# Altium PCB MB784.PCBDOC (part 4 of 4)
Units mil, origin at the board's own origin, x right, y up, seen from the top; angles counter-clockwise.
Board outline 4505 x 6805 mil, 4 copper layers (TopLayer, GND, S1, BottomLayer); 363 components, 323 nets, 1564 pads, 534 vias.
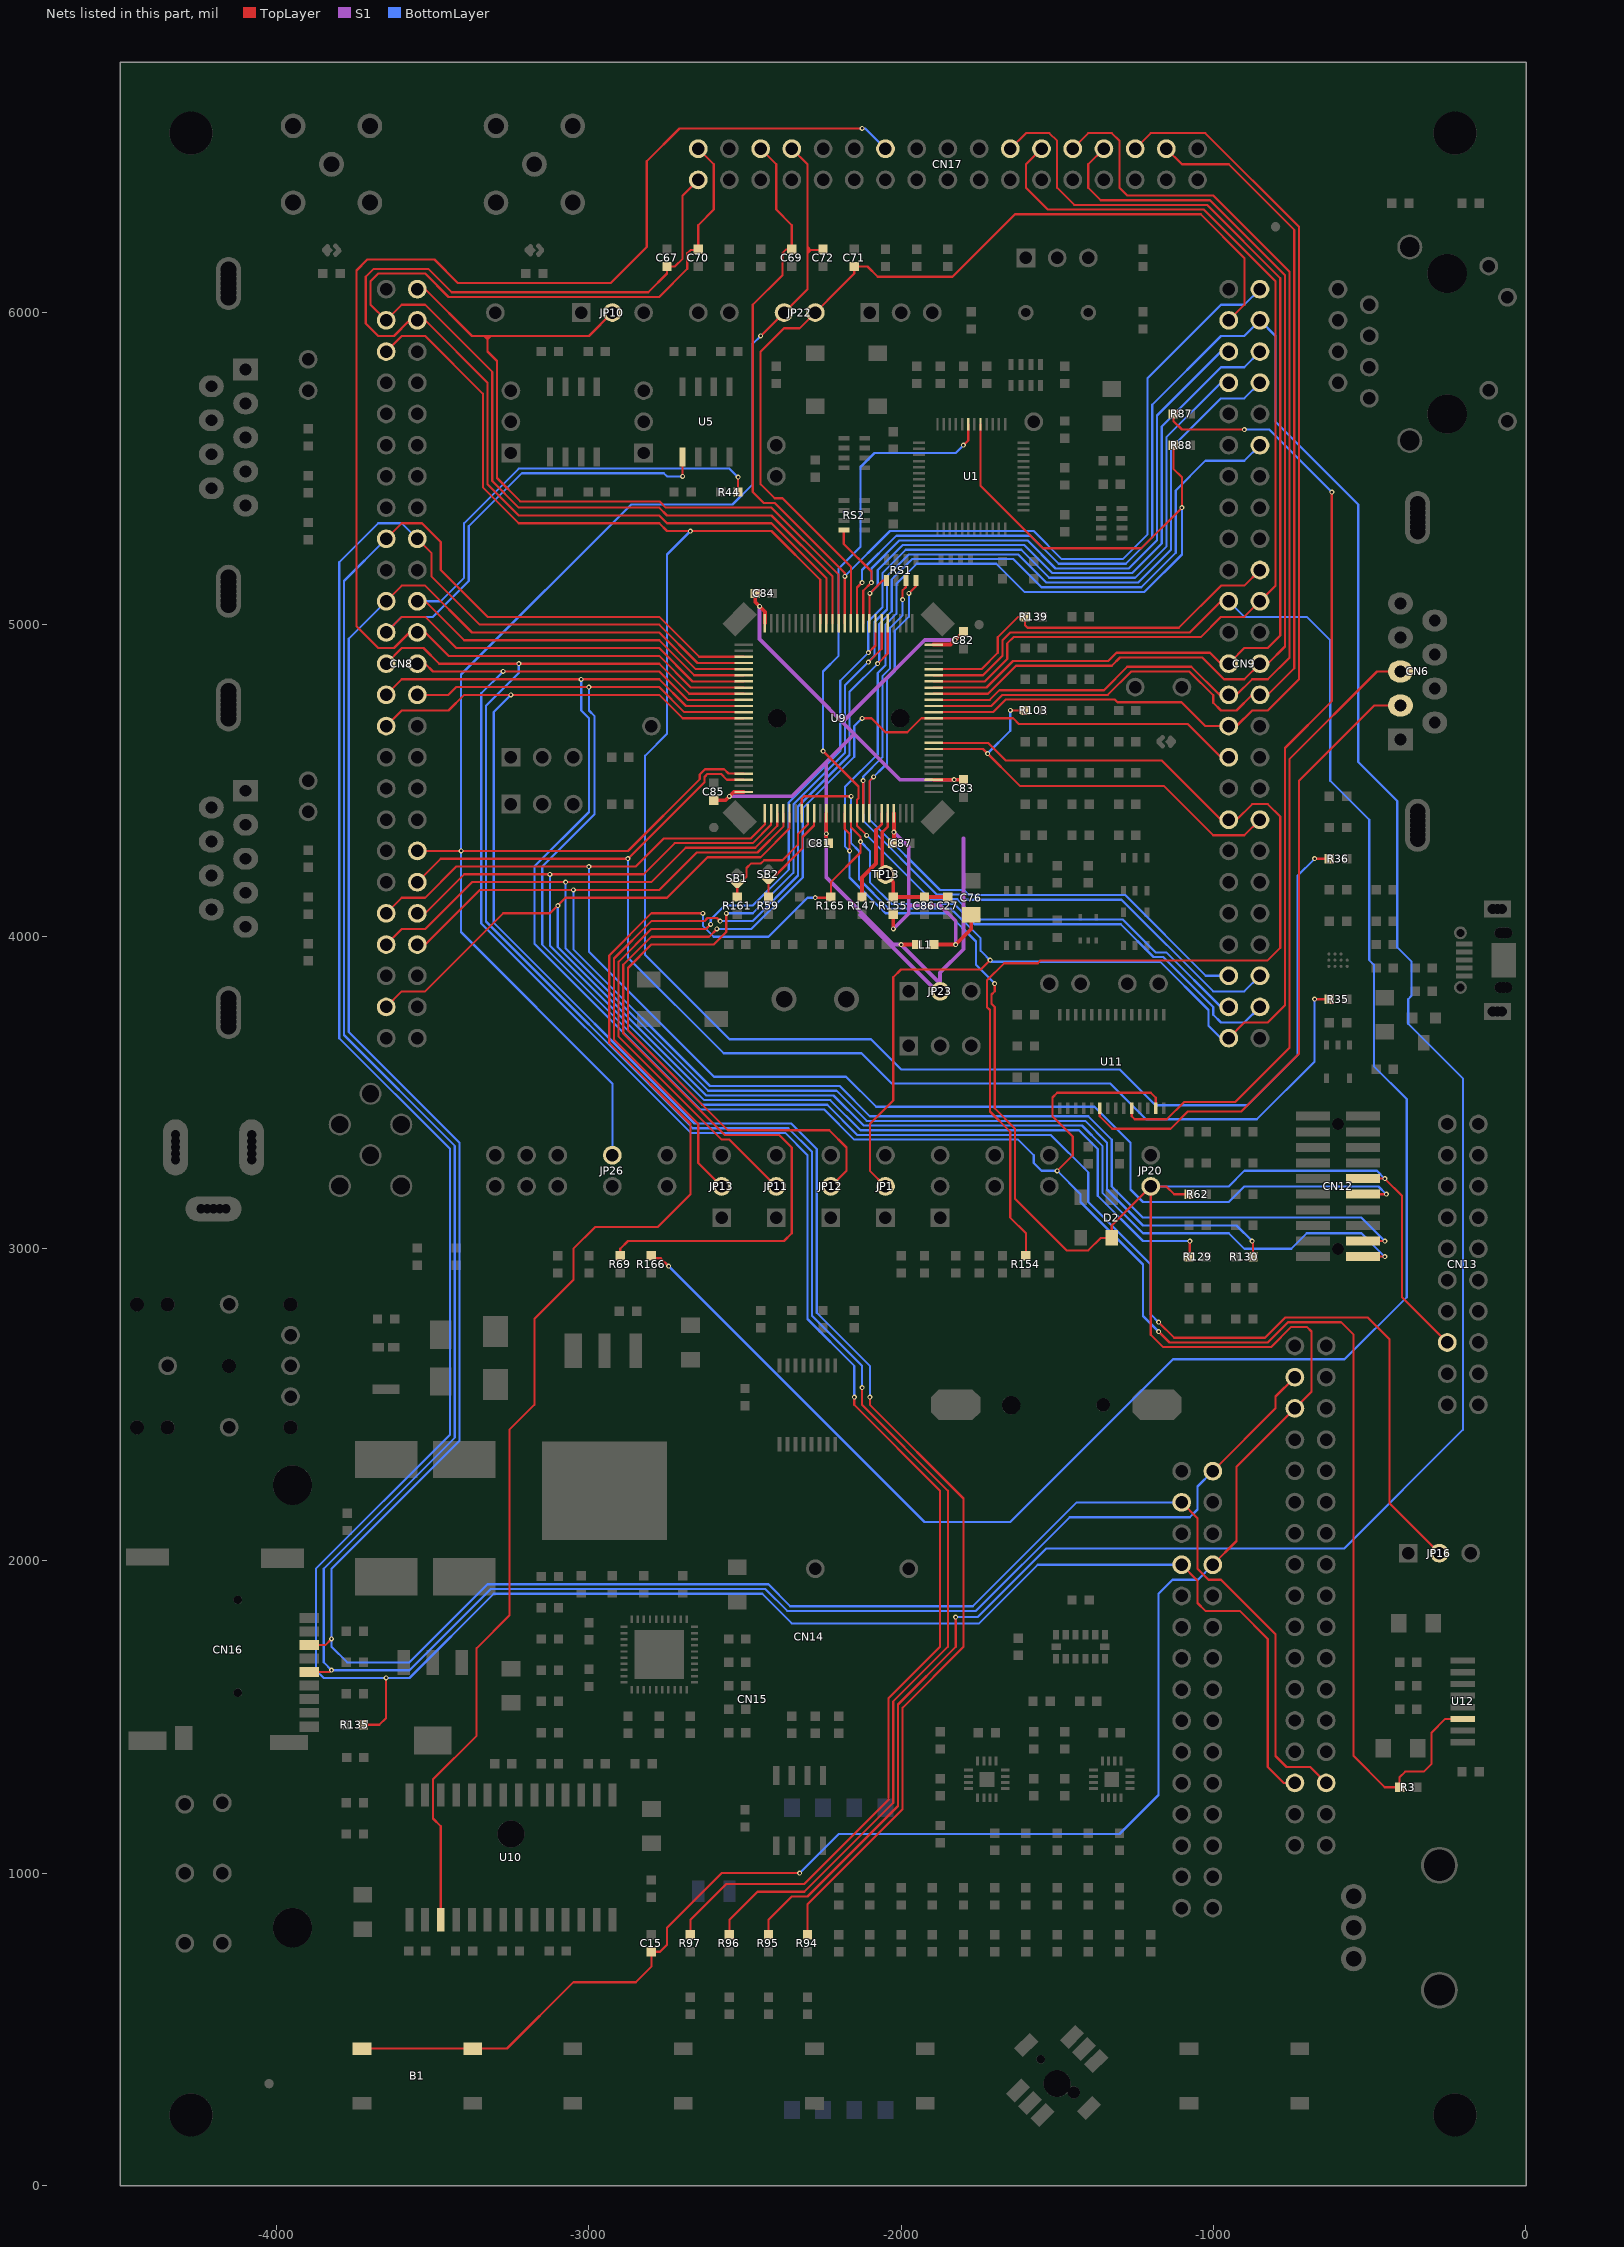
[diagram p6: the nets of this part, all layers, seen from the top]

## Via types
v1: diameter 16, hole 8, TopLayer to BottomLayer, tented both sides, 534 vias

## Nets (pads, with @x,y where several pads share a name; then routed paths per layer and width w, separated by ;. In a path a pad name is that pad's centre, name@x,y a point inside that pad or via, vN(x,y) a via of type N, cw(c..) or ccw(c..) an arc to the next point about the centre after c; other vN are vias at no path point) (continued)
PC0: CN9.48 R165.1 U9.15 U10.3 | length 6472.8
  TopLayer w7: U10.3@-3475,850 -3475,1150 -3500,1175 -3500,1300 -3360,1440 -3360,1720 -3255,1825 -3255,2420 -3175,2500 -3175,2775 -3050,2900 -3050,3000 -2980,3070 -2780,3070 -2675,3175 -2675,3400 -2935,3660 -2935,3940 -2800,4075 v1(-2635,4075) ; v1(-2275,4125) R165.1@-2225,4125 ; R165.1@-2225,4127.5 -2225,4175 -2130,4270 -2130,4320 -2160,4350 U9.15@-2160,4395.24
  BottomLayer w7: v1(-2635,4075) -2635,4035 -2600,4000 -2425,4000 -2300,4125 v1(-2275,4125) ; v1(-2130,4305) -2100,4275 -2100,4175 -2030,4105 -1830,4105 -1765,4040 -1296.21,4040 -1191.21,3935 -1160,3935 -1000,3775 -1000,3750 -975,3725 -900,3725 CN9.48@-850,3775
PC1: CN9.47 U1.31 U9.16 | length 3112
  TopLayer w7: v1(-2250,4595) -2136.26,4481.26 -2136.26,4443.74 -2140.94,4439.06 -2140.94,4355.94 v1(-2110,4325) ; v1(-1800,5575) -1784.84,5590.16 U1.31@-1784.84,5642.32
  BottomLayer w7: v1(-2250,4595) -2250,4850 -2200,4900 -2200,5180 -2130,5250 -2130,5505 -2085,5550 -1825,5550 v1(-1800,5575) ; v1(-2110,4325) -1905,4120 -1820,4120 -1755,4055 -1290,4055 -1185,3950 -1150,3950 -975,3775 CN9.47@-950,3775
PC2: CN9.46 RS1.4 U9.17 | length 2449.3
  TopLayer w7: U9.17@-2121.26,4395.87 v1(-2121.26,4499.95) ; v1(-1995,5080) -1995,5110 -1984.25,5120.75 RS1.4@-1984.25,5141.5
  BottomLayer w7: v1(-1995,5080) -1995,5030 -2035,4990 -2035,4860 -2060,4835 -2060,4575 -2121.26,4513.74 -2121.26,4371.26 -1885,4135 -1810,4135 -1793.5,4118.5 -1293.5,4118.5 -1000,3825 -900,3825 CN9.46@-850,3875
PC3: CN9.45 RS1.2 U9.18 | length 2306.5
  TopLayer w7: U9.18@-2101.57,4395.87 -2101.57,4498.43 v1(-2087.9,4512.1) ; v1(-1975,5100) -1952.76,5122.24 RS1.2@-1952.76,5141.5
  BottomLayer w7: v1(-1975,5100) -1975,5025 -2020,4980 -2020,4850 -2045,4825 -2045,4555 -2100,4500 -2100,4375 -1875,4150 -1800,4150 -1783.5,4133.5 -1282.14,4133.5 -1023.64,3875 CN9.45@-950,3875
PC4: CN9.36 R103.1 U9.33 | length 1396.7
  TopLayer w7: U9.33@-1895.87,4601.57 -1737.35,4601.57 -1619.28,4483.5 -1158.5,4483.5 -1000,4325 -900,4325 CN9.36@-850,4375 ; v1(-1650,4725) R103.1@-1602.5,4725
  BottomLayer w7: v1(-1722.89,4587.11) -1650,4660 v1(-1650,4725)
PC5: CN9.35 R154.1 U9.34 | length 3587.9
  TopLayer w7: U9.34@-1895.87,4621.26 -1721.26,4621.26 -1665,4565 -1165,4565 -975,4375 -925,4375 -875,4425 -825,4425 -785,4385 -785,3965 -826.5,3923.5 -1554.07,3923.5 -1562.22,3915.35 -1669.65,3915.35 -1725,3860 -1725,3775 -1715,3765 -1715,3440 -1650,3375 -1650,3100 -1600,3050 R154.1@-1600,2977.5
PC6: CN8.2 JP10.2 U9.63 | length 2603.2
  TopLayer w7: CN8.2@-3560,6075 -3525,6075 -3375,5925 -3000,5925 JP10.2@-2925,6000 ; -3335,5925 -3325,5915 -3315,5925 ; -3325,5925 -3325,5875 -3295,5845 -3295,5470 -3220,5395 -2773.79,5395 -2753.79,5375 -2415,5375 -2200,5160 U9.63@-2200,5004.13
PC7: C70.2 CN8.3 CN17.33 U9.64 | length 3860.6
  TopLayer w7: CN17.33@-2650,6525 -2600,6475 -2600,6330 -2650,6280 C70.2@-2650,6202.5 -2652.5,6200 -2675,6200 -2685,6190 -2685,6140 -2775,6050 -3450,6050 -3525,6125 -3675,6125 -3700,6100 -3700,6025 CN8.3@-3650,5975 -3600,6025 -3525,6025 -3310,5810 -3310,5460 -3225,5375 -2775,5375 -2750,5350 -2415,5350 -2219.69,5154.69 U9.64@-2219.69,5004.13
PC8: C67.2 CN8.4 CN17.34 U9.65 | length 3727.9
  TopLayer w7: CN17.34@-2650,6425 -2700,6375 -2700,6172.5 -2725,6147.5 C67.2@-2750,6147.5 -2750,6125 -2810,6065 -3440,6065 -3515,6140 -3690,6140 -3715,6115 -3715,5965 -3675,5925 -3625,5925 -3575,5975 -3525,5975 -3325,5775 -3325,5450 -3225,5350 -2775,5350 -2750,5325 -2415,5325 -2239.37,5149.37 U9.65@-2239.37,5004.13
PC9: CN8.5 R36.2 U9.66 | length 6525.2
  TopLayer w7: CN8.5@-3650,5875 -3600,5925 -3525,5925 -3340,5740 -3340,5440 -3225,5325 -2775,5325 -2750,5300 -2415,5300 -2259.06,5144.06 U9.66@-2259.06,5004.13 ; v1(-675,4250) R36.2@-627.5,4250
  BottomLayer w7: v1(-2675,5300) -2750,5225 -2750,4650 -2820,4580 -2820,3941.69 -2549.81,3671.5 -2096.5,3671.5 -2000,3575 -1300,3575 -1185,3460 -890,3460 -730,3620 -730,4195 v1(-675,4250)
PC10: CN8.17 CN14.3 CN15.2 CN16.5 U9.78 | length 9082.4
  TopLayer w7: CN16.5@-3896.65,1643.7 -3831.3,1643.7 v1(-3825,1650) ; CN8.17@-3650,5275 -3600,5325 -3535,5325 -3475,5265 -3475,5175 -3325,5025 -2775,5025 -2646.85,4896.85 U9.78@-2504.13,4896.85 ; CN15.2@-1001.06,2287.72 -800,2488.78 -800,2526.78 CN14.3@-738.06,2588.72
  BottomLayer w7: CN8.17@-3650,5275 -3785,5140 -3785,3685 -3430,3330 -3430,2395 -3850,1975 -3850,1675 v1(-3825,1650) -3575,1650 -3315,1910 -2435,1910 -2365,1840 -1760,1840 -1460,2140 -1075,2140 -1050,2165 -1050,2238.78 CN15.2@-1001.06,2287.72
PC11: CN8.18 CN14.29 CN15.7 R135.1 U9.79 | length 9609.9
  TopLayer w7: R135.1@-3722.5,1475 -3671.69,1475 -3650,1496.69 v1(-3650,1625) ; CN8.18@-3550,5275 -3505,5230 -3505,5155 -3350,5000 -2775,5000 -2652.17,4877.17 U9.79@-2504.13,4877.17 ; CN15.7@-1101.06,1987.72 -1050,1936.65 -1050,1865 -1025,1840 -915,1840 -825,1750 -825,1340 -773.72,1288.72 CN14.29@-738.06,1288.72
  BottomLayer w7: CN8.18@-3550,5275 -3600,5325 -3675,5325 -3800,5200 -3800,3675 -3445,3320 -3445,2405 -3875,1975 -3875,1650 -3850,1625 -3575,1625 -3305,1895 -2445,1895 -2350,1800 -1750,1800 -1562.28,1987.72 CN15.7@-1101.06,1987.72
PC12: CN8.21 CN14.30 CN15.3 CN16.3 U9.80 | length 9250.7
  TopLayer w7: CN16.3@-3896.65,1730.31 -3844.69,1730.31 v1(-3825,1750) ; CN8.21@-3650,5075 -3600,5125 -3525,5125 -3375,4975 -2775,4975 -2657.48,4857.48 U9.80@-2504.13,4857.48 ; CN15.3@-1097.72,2187.72 CN15.3@-1101.06,2187.72 -1050,2136.65 -1050,1975 -1015,1940 -975,1940 -800,1765 -800,1375 -765,1340 -689.35,1340 CN14.30@-638.06,1288.72
  BottomLayer w7: CN8.21@-3650,5075 -3770,4955 -3770,3695 -3415,3340 -3415,2385 -3825,1975 -3825,1725 -3775,1675 -3575,1675 -3325,1925 -2425,1925 -2355,1855 -1770,1855 -1437.28,2187.72 CN15.3@-1101.06,2187.72
PC13: CN9.49 JP1.2 R87.1 U9.7 | length 5541.2
  TopLayer w7: U9.7@-2318.11,4395.87 -2318.11,4441.89 -2310,4450 v1(-2160,4450) ; JP1.2@-2050,3200 -2100,3250 -2100,3400 -2025,3475 -2025,3870 -2000,3895 -1745,3895 v1(-1715,3925) ; R87.1@-1127.5,5675 -1127.5,5652.5 -1100,5625 v1(-900,5625) ; CN9.49@-950,3675 -900,3725 -825,3725 -770,3780 -770,4605 -620,4755 v1(-620,5425)
  BottomLayer w7: v1(-2160,4450) -2160,4300 -2135,4275 -2135,4185 -2040,4090 -1840,4090 -1745,3995 -1745,3955 -1710,3920 -1170,3920 -1015,3765 -1015,3715 -975,3675 CN9.49@-950,3675 ; v1(-900,5625) -820,5625 v1(-620,5425)
PC14: R161.2 SB1.1 U9.8 | length 414.9
  TopLayer w7: R161.2@-2525,4127.5 -2525,4162.19 -2495,4192.19 -2495,4220 -2480,4235 -2448.79,4235 -2438.79,4245 -2380,4245 -2330.71,4294.29 -2330.71,4328.08 -2298.43,4360.36 U9.8@-2298.43,4395.87
PC15: R59.2 SB2.1 U9.9 | length 325.6
  TopLayer w7: R59.2@-2425,4127.5 SB2.1@-2425,4182 ; SB2.1@-2417,4182 -2315.71,4283.29 -2315.71,4319.29 -2278.74,4356.26 U9.9@-2278.74,4395.87
PD0: CN8.22 R44.2 U9.81 | length 2509.1
  TopLayer w7: CN8.22@-3550,5075 -3525,5075 -3400,4950 -2775,4950 -2662.8,4837.8 U9.81@-2504.13,4837.8 ; R44.2@-2522.5,5425 v1(-2522.5,5472.5)
  BottomLayer w7: CN8.22@-3550,5075 -3475,5075 -3400,5150 -3400,5325 -3225,5500 -2550,5500 v1(-2522.5,5472.5)
PD1: CN8.23 U5.1 U9.82 | length 2582.7
  TopLayer w7: CN8.23@-3650,4975 -3600,5025 -3525,5025 -3425,4925 -2775,4925 -2668.11,4818.11 U9.82@-2504.13,4818.11 ; v1(-2700,5475) U5.1@-2700,5537.5
  BottomLayer w7: CN8.23@-3650,4975 -3600,5025 -3500,5025 -3385,5140 -3385,5315 -3215,5485 -2760,5485 -2750,5475 v1(-2700,5475)
PD2: CN8.24 CN17.21 U9.83 | length 4637.3
  TopLayer w7: U9.83@-2504.13,4798.43 -2673.43,4798.43 -2775,4900 -3450,4900 -3525,4975 -3575,4975 -3625,4925 -3675,4925 -3745,4995 -3745,6135 -3710,6170 -3495,6170 -3420,6095 -2930,6095 -2815,6210 -2815,6485 -2710,6590 v1(-2125,6590)
  BottomLayer w7: v1(-2125,6590) -2115,6590 CN17.21@-2050,6525
PD3: CN8.25 R96.2 U9.84 | length 6513.5
  TopLayer w7: CN8.25@-3650,4875 -3600,4925 -3530,4925 -3480,4875 -2775,4875 -2678.74,4778.74 U9.84@-2504.13,4778.74 ; R96.2@-2550,802.5 -2550,850 -2460,940 -2310,940 -2025,1225 -2025,1550 -1850,1725 -1850,2225 -2125,2500 v1(-2125,2555)
  BottomLayer w7: v1(-3225,4875) -3225,4845 -3330,4740 -3330,4048.64 -2667.86,3386.5 -2361.5,3386.5 -2285,3310 -2285,2785 -2125,2625 v1(-2125,2555)
PD4: CN8.26 R97.2 U9.85 | length 6434.3
  TopLayer w7: CN8.26@-3550,4875 -3525,4875 -3500,4850 -2775,4850 -2684.06,4759.06 U9.85@-2504.13,4759.06 ; R97.2@-2675,802.5 -2675,850 -2560,965 -2310,965 -2040,1235 -2040,1560 -1875,1725 -1875,2225 -2150,2500 v1(-2150,2525)
  BottomLayer w7: v1(-3275,4850) -3345,4780 -3345,4042.43 -2674.07,3371.5 -2371.5,3371.5 -2300,3300 -2300,2775 -2150,2625 v1(-2150,2525)
PD5: CN8.27 R3.2 U9.86 U11.13 U12.3 | length 8025.1
  TopLayer w7: CN8.27@-3650,4775 -3600,4825 -2775,4825 -2689.37,4739.37 U9.86@-2504.13,4739.37 ; v1(-1500,3250) -1450,3300 -1450,3360 -1515,3425 -1515,3485 -1500,3500 -1200,3500 -1184.25,3484.25 U11.13@-1184.25,3450.39 ; v1(-1175,2735) -1140,2700 -825,2700 -760,2765 -590,2765 -550,2725 -550,1375 -450,1275 R3.2@-402.5,1275 -402.5,1307.5 -385,1325 -325,1325 -300,1350 -300,1450 -256.1,1493.9 U12.3@-200,1493.9
  BottomLayer w7: v1(-3025,4825) -3025,4725 -3000,4700 -3000,4400 -3175,4225 -3175,3978.49 -2643.01,3446.5 -2246.5,3446.5 -2150,3350 -1625,3350 -1575,3300 -1575,3275 -1550,3250 v1(-1500,3250) -1425,3175 -1425,3150 -1225,2950 -1225,2785 v1(-1175,2735)
PD6: CN8.28 JP16.2 U9.87 | length 6185.3
  TopLayer w7: CN8.28@-3550,4775 -3450,4775 -3425,4800 -2775,4800 -2694.68,4719.68 U9.87@-2504.13,4719.68 ; v1(-1175,2765) -1125,2715 -833.79,2715 -768.79,2780 -505,2780 -435,2710 -435,2185 JP16.2@-275,2025
  BottomLayer w7: v1(-3000,4800) -3000,4725 -2981.89,4706.89 -2981.89,4393.11 -3150,4225 -3150,3974.71 -2636.79,3461.5 -2236.5,3461.5 -2140,3365 -1520,3365 -1400,3245 -1400,3150 -1200,2950 -1200,2790 v1(-1175,2765)
PD7: CN8.29 R94.2 U9.88 | length 6225.8
  TopLayer w7: CN8.29@-3650,4675 -3600,4725 -3450,4725 -3400,4775 -2775,4775 -2700,4700 U9.88@-2504.13,4700 ; R94.2@-2300,802.5 -2300,900 -1995,1205 -1995,1530 -1800,1725 -1800,2200 -2100,2500 v1(-2100,2525)
  BottomLayer w7: v1(-3250,4775) -3305,4720 -3305,4044.85 -2661.65,3401.5 -2351.5,3401.5 -2270,3320 -2270,2795 -2100,2625 v1(-2100,2525)
PD8: CN9.12 JP13.2 U9.55 | length 4346.9
  TopLayer w7: v1(-2580,4050) -2590,4060 -2620,4060 -2630,4050 -2800,4050 -2920,3930 -2920,3670 -2650,3400 -2650,3275 JP13.2@-2575,3200 ; v1(-2075,4875) -2042.52,4907.48 U9.55@-2042.52,5004.13
  BottomLayer w7: v1(-2580,4050) -2476.21,4050 -2330,4196.21 -2330,4417.57 -2165,4582.57 -2165,4785 -2070,4880 -2070,5002.57 -2030,5042.57 -2030,5145 -1965,5210 -1640,5210 -1550,5120 -1230,5120 -1120,5230 -1120,5430 -1025,5525 -900,5525 CN9.12@-850,5575
PD9: CN9.8 JP12.2 U9.56 | length 4825.4
  TopLayer w7: v1(-2560,4075) -2560,4015 -2600,3975 -2800,3975 -2875,3900 -2875,3700 -2555,3380 -2230,3380 -2175,3325 -2175,3250 JP12.2@-2225,3200 ; v1(-2105,4880) -2062.2,4922.8 U9.56@-2062.2,5004.13
  BottomLayer w7: v1(-2560,4075) -2475,4075 -2345,4205 -2345,4423.79 -2180,4588.79 -2180,4805 -2085,4900 -2085,5008.79 -2045,5048.79 -2045,5155 -1975,5225 -1625,5225 -1535,5135 -1240,5135 -1135,5240 -1135,5565 -975,5725 -900,5725 CN9.8@-850,5775
PD10: CN9.7 JP11.2 U9.57 | length 4447.1
  TopLayer w7: v1(-2610,4040) -2625,4025 -2800,4025 -2905,3920 -2905,3680 -2575,3350 -2550,3350 JP11.2@-2395,3195 ; v1(-2105,4910) -2081.89,4933.11 U9.57@-2081.89,5004.13
  BottomLayer w7: v1(-2610,4040) -2610,4055 -2565,4100 -2475,4100 -2360,4215 -2360,4430 -2195,4595 -2195,4820 v1(-2105,4910) -2105,5010 -2060,5055 -2060,5165 -1985,5240 -1615,5240 -1525,5150 -1250,5150 -1150,5250 -1150,5600 -975,5775 CN9.7@-950,5775
PD11: CN9.6 RS1.8 U9.58 | length 2058.8
  TopLayer w7: U9.58@-2101.57,5004.13 v1@-2101.57,5098.43 ; v1(-2100,5100) -2058.5,5141.5 RS1.8@-2047.24,5141.5
  BottomLayer w7: v1(-2100,5100) -2075,5125 -2075,5175 -1995,5255 -1605,5255 -1515,5165 -1260,5165 -1165,5260 -1165,5635 -975,5825 -900,5825 CN9.6@-850,5875
PD12: CN9.5 RS2.2 U9.59 | length 2132.9
  TopLayer w7: RS2.2@-2183.5,5302.76 -2183.5,5258.5 -2095,5170 v1(-2095,5135) -2121.26,5108.74 U9.59@-2121.26,5004.13
  BottomLayer w7: v1(-2095,5135) -2095,5180 -2005,5270 -1595,5270 -1505,5180 -1270,5180 -1180,5270 -1180,5670 -975,5875 CN9.5@-950,5875
PD13: CN9.4 R95.2 U9.60 | length 9108.7
  TopLayer w7: R95.2@-2425,802.5 -2425,850 -2350,925 -2300,925 -2010,1215 -2010,1540 -1825,1725 v1(-1825,1820) ; U9.60@-2140.94,5004.13 -2140.94,5119.06 v1(-2125,5135)
  BottomLayer w7: v1(-2125,5135) -2125,5175 -2015,5285 -1585,5285 -1495,5195 -1280,5195 -1195,5280 -1195,5705 -975,5925 -900,5925 CN9.4@-850,5975 -800,5925 -800,5650 -535,5385 -535,4560 -410,4435 -410,3966.07 -365,3921.07 -365,3810 -375,3800 -375,3721.21 -200,3546.21 -200,2420 -580,2040 -1535,2040 -1755,1820 v1(-1825,1820)
PD14: C71.2 CN9.3 JP22.2 U9.61 | length 3056.4
  TopLayer w7: U9.61@-2160.63,5004.13 -2160.63,5185.63 -2380,5405 -2405,5405 -2450,5450 -2450,5875 -2375,5950 -2325,5950 -2150,6125 C71.2@-2150,6147.5 -2107.5,6147.5 -2075,6115 -1835,6115 -1635,6315 -1040,6315 -900,6175 -900,6025 CN9.3@-950,5975
PD15: C69.2 CN9.2 CN17.29 U9.62 | length 3846.2
  TopLayer w7: CN17.29@-2450,6525 -2400,6475 -2400,6330 -2350,6280 C69.2@-2350,6202.5 -2367.5,6202.5 -2380,6190 -2380,6120 -2475,6025 -2475,5425 -2440,5390 -2405,5390 -2180.32,5165.32 U9.62@-2180.32,5004.13 U9.62@-2180,5003.82
  BottomLayer w7: v1(-2180.32,5155) -2035.32,5300 -1575,5300 -1485,5210 -1290,5210 -1210,5290 -1210,5790 -975,6025 -900,6025 CN9.2@-850,6075
PE0: C72.2 CN8.38 CN17.27 JP22.1 JP26.2 U9.97 | length 5341.5
  TopLayer w7: CN8.38@-3550,4275 -2875,4275 -2645,4505 -2645,4520 -2628.11,4536.89 -2566.89,4536.89 -2552.83,4522.83 U9.97@-2504.13,4522.83 ; v1(-2450,5925) -2300,6075 -2300,6475 CN17.27@-2350,6525 ; -2300,6190 -2290,6200 -2300,6210 ; -2300,6200 C72.2@-2252.5,6200
  BottomLayer w7: JP26.2@-2925,3300 -2925,3530 -3410,4015 -3410,4840 -2865,5385 -2540,5385 -2475,5450 -2475,5900 v1(-2450,5925)
  other v1: -3410,4275
PE1: CN8.40 R35.1 U9.98 | length 4262.9
  TopLayer w7: CN8.40@-3550,4175 -3475,4250 v1(-2875,4250) -2630,4495 -2630,4511.89 -2620,4521.89 -2576.89,4521.89 -2558.15,4503.15 U9.98@-2504.13,4503.15 ; v1(-675,3800) R35.1@-627.5,3800
  BottomLayer w7: v1(-2875,4250) -2875,3933.05 -2568.45,3626.5 -2126.5,3626.5 -2030,3530 -1330,3530 -1215,3415 -860,3415 -675,3600 v1(-675,3800)
PE2: CN8.41 CN12.12 U9.1 | length 4721.7
  TopLayer w7: CN8.41@-3650,4075 -3600,4125 -3525,4125 -3425,4225 -2850,4225 -2760,4315 -2481.54,4315 -2436.22,4360.31 U9.1@-2436.22,4395.87 ; CN12.12@-520,3175 v1(-445,3175)
  BottomLayer w7: v1(-3000,4225) -3000,3951.98 -2599.52,3551.5 -2176.5,3551.5 -2080,3455 -1380,3455 -1265,3340 -1265,3190 -1225,3150 -950,3150 -900,3200 -470,3200 v1(-445,3175)
PE3: CN8.42 R129.2 U9.2 | length 4094.5
  TopLayer w7: CN8.42@-3550,4075 -3525,4075 -3400,4200 -2825,4200 -2725,4300 -2475,4300 -2416.54,4358.46 U9.2@-2416.54,4395.87 ; R129.2@-1075,2977.5 v1(-1075,3025)
  BottomLayer w7: v1(-3125,4200) -3125,3970.92 -2630.58,3476.5 -2226.5,3476.5 -2130,3380 -1430,3380 -1370,3320 -1370,3170 -1225,3025 v1(-1075,3025)
PE4: CN8.43 R130.2 U9.3 | length 4390.5
  TopLayer w7: CN8.43@-3650,3975 -3600,4025 -3525,4025 -3375,4175 -2800,4175 -2690,4285 -2467.17,4285 -2396.85,4355.32 U9.3@-2396.85,4395.87 ; v1(-875,3025) -872.5,3022.5 R130.2@-872.5,2975
  BottomLayer w7: v1(-3075,4175) -3075,3963.35 -2618.15,3506.5 -2206.5,3506.5 -2110,3410 -1410,3410 -1340,3340 -1340,3190 -1225,3075 -925,3075 v1(-875,3025)
PE5: CN8.44 CN12.18 U9.4 | length 4707.8
  TopLayer w7: CN8.44@-3550,3975 -3525,3975 -3350,4150 -2775,4150 -2655,4270 -2460,4270 -2377.17,4352.83 U9.4@-2377.17,4395.87 ; CN12.18@-520,3025 v1(-450,3025)
  BottomLayer w7: v1(-3050,4150) -3050,3959.56 -2611.94,3521.5 -2196.5,3521.5 -2100,3425 -1400,3425 -1325,3350 -1325,3200 -1225,3100 -525,3100 v1(-450,3025)
PE6: CN8.47 CN12.20 U9.5 | length 4971.1
  TopLayer w7: CN8.47@-3650,3775 -3600,3825 -3525,3825 -3275,4075 -3125,4075 -3075,4125 -2750,4125 -2620,4255 -2450,4255 -2357.48,4347.52 U9.5@-2357.48,4395.87 ; CN12.20@-520,2975 v1(-450,2975)
  BottomLayer w7: v1(-3100,4100) -3100,3967.13 -2624.37,3491.5 -2216.5,3491.5 -2120,3395 -1420,3395 -1355,3330 -1355,3180 -1225,3050 -950,3050 -900,3000 -750,3000 -700,3050 -525,3050 v1(-450,2975)
PE7: CN9.31 R69.1 U9.38 | length 4323.1
  TopLayer w7: R69.1@-2900,2977.5 -2900,3000 -2875,3025 -2375,3025 -2350,3050 -2350,3325 -2390,3365 -2565,3365 -2890,3690 -2890,3910 -2800,4000 -2615,4000 v1(-2590,4025) ; v1(-2125,4700) -2095,4700 -2050,4655 -1980,4655 -1935,4700 -1641,4700 -1622.5,4681.5 -1081.5,4681.5 -975,4575 CN9.31@-950,4575
  BottomLayer w7: v1(-2590,4025) -2480,4025 -2315,4190 -2315,4411.36 -2150,4576.36 -2150,4675 v1(-2125,4700)
PE8: CN9.29 CN17.5 U9.39 | length 3389.9
  TopLayer w7: U9.39@-1895.87,4719.68 -1705.32,4719.68 -1665,4760 -1315,4760 -1306.5,4751.5 -1101.5,4751.5 -1025,4675 CN9.29@-940,4675 ; CN17.5@-1250,6525 -1200,6575 -1025,6575 -725,6275 -725,4825 -825,4725 -875,4725 CN9.29@-925,4675
PE9: CN9.28 CN17.3 U9.40 | length 3246
  TopLayer w7: U9.40@-1895.87,4739.37 -1710.63,4739.37 -1675,4775 -1337.5,4775 -1262.5,4850 -1076.21,4850 -1000,4773.79 -1000,4750 -975,4725 -925,4725 -875,4775 -825,4775 -740,4860 -740,6265 -950,6475 -1100,6475 CN17.3@-1150,6525
PE10: CN9.27 CN17.9 U9.41 | length 3469.6
  TopLayer w7: U9.41@-1895.87,4759.06 -1715.94,4759.06 -1685,4790 -1350,4790 -1275,4865 -1070,4865 -980,4775 CN9.27@-950,4775 ; CN17.9@-1450,6525 -1400,6575 -1325,6575 -1300,6550 -1300,6400 -1275,6375 -1000,6375 -755,6130 -755,4895 -825,4825 -875,4825 CN9.27@-925,4775
PE11: CN9.26 CN17.7 U9.42 | length 3328.2
  TopLayer w7: U9.42@-1895.87,4778.74 -1721.26,4778.74 -1631.5,4868.5 -1325,4868.5 -1298.5,4895 -1035,4895 -965,4825 -900,4825 CN9.26@-850,4875 -825,4875 -770,4930 -770,6120 -1010,6360 -1360,6360 -1400,6400 -1400,6475 CN17.7@-1350,6525
PE12: CN9.25 CN17.13 U9.43 | length 3511.6
  TopLayer w7: U9.43@-1895.87,4798.43 -1726.57,4798.43 -1641.5,4883.5 -1336.5,4883.5 -1310,4910 -1010,4910 -975,4875 CN9.25@-950,4875 ; CN17.13@-1650,6525 -1600,6575 -1525,6575 -1500,6550 -1500,6400 -1445,6345 -1020,6345 -785,6110 -785,4965 -825,4925 -900,4925 CN9.25@-944,4881
PE13: CN9.22 CN17.11 U9.44 | length 3297.2
  TopLayer w7: U9.44@-1895.87,4818.11 -1731.89,4818.11 -1660,4890 -1660,4940 -1640,4960 -1040,4960 -975,5025 -900,5025 -800,5125 -800,6100 -1030,6330 -1530,6330 -1600,6400 -1600,6475 CN17.11@-1550,6525
PE14: CN9.21 R166.1 U9.45 | length 6699.9
  TopLayer w7: R166.1@-2800,2970 -2770,2970 v1(-2745,2945) ; U9.45@-1895.87,4837.8 -1737.2,4837.8 -1675,4900 -1675,4950 -1650,4975 -1075,4975 CN9.21@-975,5075
  BottomLayer w7: v1(-2745,2945) -1925,2125 -1650,2125 -1129,2646 -579,2646 -380,2845 -380,3480 -485,3585 -485,3910 -500,3925 -500,4375 -625,4500 -625,4950 -700,5025 -900,5025 CN9.21@-950,5075
PE15: CN9.20 R139.2 U9.46 | length 1251.8
  TopLayer w7: U9.46@-1895.87,4857.48 -1742.52,4857.48 -1690,4910 -1690,4960 -1625,5025 R139.2@-1602.5,5025 -1602.5,4997.5 -1595,4990 -1110,4990 -975,5125 -900,5125 CN9.20@-850,5175
RESET#: B1.2 B1.3 C15.2 CN12.10 CN13.15 CN14.5 CN15.8 D2.1 JP20.2 R62.1 R88.2 U1.29 U9.14 | length 12813.7
  TopLayer w7: B1.2@-3727.17,437.5 -3262.5,437.5 -3050,650 -2850,650 -2800,700 C15.2@-2800,747.5 -2772.5,747.5 -2750,770 -2750,825 -2575,1000 v1(-2325,1000) ; U9.14@-2180.32,4395.87 -2180.32,4345.32 -2165,4330 v1(-2165,4275) ; U1.29@-1745.47,5642.32 -1745.47,5445.47 -1545,5245 -1230,5245 v1(-1100,5375) -1100,5472.5 -1127.5,5500 R88.2@-1127.5,5575 ; v1(-1700,3850) -1700,3825 -1710,3815 -1710,3785 -1700,3775 -1700,3450 -1635,3385 -1635,3160 -1470,2995 -1400,2995 -1360,3035 D2.1@-1325,3035 -1325,3075 JP20.2@-1200,3200 ; R62.1@-1077.5,3175 -1125,3175 -1150,3200 JP20.2@-1200,3200 ; CN15.8@-1001.06,1987.72 -925,2063.78 -925,2301.78 -685,2541.78 -685,2735 -700,2750 -750,2750 -815,2685 -1160,2685 -1200,2725 JP20.2@-1200,3200 ; CN12.10@-520,3225 v1(-450,3225) -395,3170 -395,2845 CN13.15@-250,2700
  BottomLayer w7: v1(-2325,1000) -2200,1125 -1300,1125 -1175,1250 -1175,1895 -1130,1940 -1048.78,1940 CN15.8@-1001.06,1987.72 ; v1(-1700,3850) -1760,3910 -1760,3985 -1850,4075 -2050,4075 -2165,4190 v1(-2165,4275) -2180,4290 -2180,4480 -2075,4585 -2075,4845 -2050,4870 -2050,5000 -2015,5035 -2015,5130 -1950,5195 -1695,5195 -1605,5105 -1220,5105 -1100,5225 v1(-1100,5375) ; JP20.2@-1200,3200 -950,3200 -900,3250 -475,3250 v1(-450,3225)
RXD: CN6.2 U11.6 | length 2079.6
  TopLayer w7: U11.6@-1363.39,3450.39 -1363.39,3425 -1323.39,3385 -1136.21,3385 -1081.21,3440 -910,3440 -725,3625 -725,4500 -484,4741 CN6.2@-400,4741
TXD: CN6.3 U11.10 | length 2026.8
  TopLayer w7: U11.10@-1261.02,3450.39 -1261.02,3425 -1251.02,3415 -1148.64,3415 -1093.64,3470 -930,3470 -755,3645 -755,4570 -475,4850 CN6.3@-400,4850
VDD_MCU: C81.1 C82.1 C83.1 C84.1 C85.1 JP23.2 L1.1 U9.11 U9.28 U9.50 U9.75 U9.100 | length 4191.4
  TopLayer w12: C85.1@-2600,4437.5 -2562.5,4437.5 -2536.22,4463.78 U9.100@-2504.13,4463.78 ; C84.1@-2467.5,5100 -2467.5,5072.5 -2436.22,5041.22 U9.75@-2436.22,5004.13 ; C81.1@-2239.37,4299.37 U9.11@-2239.37,4395.87 ; v1(-2000,3975) L1.1@-1950,3975 ; U9.28@-1895.87,4503.15 C83.1@-1800.65,4503.15 ; U9.50@-1895.87,4936.22 -1841.28,4936.22 C82.1@-1800,4977.5
  S1 w12: v1(-2549.93,4450.07) -2349.93,4450.07 -2150,4650 ; v1(-2453.59,5058.59) -2453.59,4953.59 -2003.15,4503.15 v1(-1830,4503.15) ; -2239.37,4560.63 -2239.37,4189.37 -2025,3975 v1(-2000,3975) JP23.2@-1875,3850 ; -2187.36,4687.64 -1924.29,4950.71 v1(-1826.79,4950.71) ; -2130,4070 -1885,3825 JP23.2@-1875,3825 -1875,3885 -1800,3960 -1800,4315
  other v1: -2239.37,4330
VDDA: C76.1 C87.1 L1.2 R155.2 U9.22 | length 920.6
  TopLayer w12: v1(-2025,4025) R155.2@-2025,4072.5 ; C87.1@-2022.83,4304.67 U9.22@-2022.83,4395.87 ; L1.2@-1895,3975 v1(-1825,3975) -1775,4025 C76.1@-1775,4070
  S1 w12: v1(-2025,4025) -1975,4075 -1975,4287.17 v1(-2022.83,4335) ; -1975,4100 -1875,4100 -1825,4050 v1(-1825,3975)
VREF+: C27.1 C86.1 R155.1 TP13.1 U9.21 | length 465.1
  TopLayer w8: -2060,4335.33 -2042.52,4352.82 U9.21@-2042.52,4395.87
  TopLayer w12: -2060,4335.33 -2060,4210 -2025,4175 R155.1@-2025,4127.5 C27.1@-1850,4127.5
VREF-: R147.2 U9.20 | length 294.4
  TopLayer w8: -2080,4342.2 -2062.2,4360 U9.20@-2062.2,4395.87
  TopLayer w12: R147.2@-2125,4127.5 -2125,4190 -2080,4235 -2080,4342.2
pads on no net: BT1.0 CN1.0 CN1.7 CN2.6 CN3.1 CN3.4 CN3.8 CN4.1 CN4.4 CN4.8 CN5.6 CN5.G0 CN6.4 CN6.6 CN6.7 CN6.9 CN7.0 CN8.31 CN8.32 CN9.23 CN9.24 CN12.0 CN12.7 CN14.0 CN14.2 CN14.4 CN14.6 CN14.7 CN14.8 CN14.9 CN14.10 CN14.11 CN14.12 CN14.13 CN14.14 CN14.15 CN14.16 CN14.17 CN14.18 CN14.19 CN14.20 CN14.21 CN15.0 CN15.4 CN15.5 CN15.6 CN15.17 CN15.18 CN15.19 CN15.20 CN15.21 CN15.22 CN15.23 CN15.24 CN15.25 CN15.26 CN15.27 CN15.28 CN15.29 CN15.30 CN16.0 CN16.1 CN16.8 RS3.7 RS3.8 RS6.8 U1.8 U1.9 U1.10 U1.11 U1.12 U4.A2 U4.B1 U4.B2 U4.C2 U5.5 U6.5 U9.0 U9.73 U10.10 U10.25 U11.5 U11.8 U11.9 U11.11 U11.12 U11.14 U11.15 U11.18 U11.20 U11.21 U12.2 U13.20 U13.21 U13.22 U13.23 U13.24 U13.25 U13.26 U13.36 U15.0 U24.1 U24.4 U24.5 U24.6 U24.7 U24.13 U24.14 U24.15 X2.2 X2.3
copper on no net: | length 11685
  TopLayer w5: -4375,1775 -4250,1775 ; -4375,1900 -4250,1900 -4125,1900 -4125,2150 ; -4375,1970 -4375,1650 ; -4375,2075 -4375,2150 ; -4270,1775 -4125,1775 ; -4250,1525 -4250,1650 ; -4250,2025 -4125,2025 ; -4250,2275 -4250,2150 ; -4125,1550 -4125,1525 -4375,1525 -4375,1650 ; -4125,1605 -4125,1650 ; -4125,1850 -4125,1650 ; -4375,1650 -4250,1650 ; -4375,2150 -4375,2275 -4130,2275 -4125,2275 -4125,2150 ; -4375,2150 -4250,2150 ; -4250,1650 -4250,2150 ; -4250,1650 -4125,1650 ; -4250,2150 -4125,2150
  S1 w5: -4375,1650 -4125,1650 ; -4375,1775 -4125,1775 ; -4375,1900 -4125,1900 ; -4375,2025 -4125,2025 ; -4250,1525 -4250,2150 -4250,2275 ; -4375,2150 -4375,2275 -4125,2275 -4125,2150 ; -4375,2150 -4375,1525 -4125,1525 -4125,2150 ; -4375,2150 -4125,2150
  BottomLayer w5: -4375,1775 -4250,1775 -4125,1775 ; -4375,1900 -4250,1900 -4125,1900 ; -4375,2025 -4250,2025 -4125,2025 ; -4250,1525 -4250,1650 ; -4250,2275 -4250,2150 ; -4375,1650 -4375,1525 -4125,1525 -4125,1650 ; -4375,1650 -4250,1650 ; -4375,1650 -4375,2150 ; -4375,2150 -4375,2275 -4125,2275 -4125,2150 ; -4375,2150 -4250,2150 ; -4250,1650 -4250,2150 ; -4250,1650 -4125,1650 ; -4250,2150 -4125,2150 ; -4125,1650 -4125,2150

## Polygon pours and split planes (outlines as drawn)
GND on TopLayer (hatched 90Degree grid 25 track 15, remove dead copper): -4500,6800 0,6800 0,0 -4500,0
+3V3 on S1 (hatched 90Degree grid 10 track 15, remove dead copper): -3970,150 5,150 5,6420 -4360,6420 -4360,3800 -3440,2880 -3440,2030 -3970,2030
+5V on S1 (hatched 90Degree grid 10 track 15, remove dead copper): -1720,3900 -1225,3900 -1150,3825 -1150,3575 -1030,3455 0,3455 0,6800 -4500,6800 -4500,0 5,0 5,1225 -350,1225 -450,1325 -475,1350 -475,1550 -700.13,1550 -700.13,1225 -450.13,975 -450.13,375 -650,175.13 -3125,175.13 -3249.87,300 -3249.87,925 -3299.87,975 -3825,975 -3875,1025 -3875,1725 -2675,1725 -2675,2050 -3025,2050 -3025,3320 -3435,3320 -4300,4185 -4300,6150 -4100,6350 -680,6350 -390,6060 -390,5685 -480,5595 -480,4320 -350,4190 -350,3550 -375,3525 -925,3525 -1050,3650 -1050,3850 -1190,3990 -1200,4000 -1725,4000 -1725,3900
VDDA on S1 (hatched 90Degree grid 10 track 10, remove dead copper): -2050,4350 -1975,4350 -1825,4200 -1825,3975 -1975,3975 -2050,4050
NetC3_1 on S1 (hatched 90Degree grid 10 track 10, remove dead copper): -2000,5625 -1525,5625 -1525,5581.09 -1575,5531.09 -1575,5425 -1475,5325 -1475,5275 -1875,5275 -1925,5325 -1925,5475 -2000,5550
+2V5 on S1 (hatched 90Degree grid 10 track 10, remove dead copper): -3575,1430 -2950,1430 -2680,1700 -2500,1700 -2500,1850 -2725,1850 -2775,1800 -3525,1800 -3525,1625 -3575,1575
NetR78_1 on S1 (hatched 90Degree grid 10 track 10, remove dead copper): -3425,3250 -3225,3250 -3225,3325.07 -3474.93,3575 -3499.93,3600 -4200,3600 -4325,3725 -4350,3750 -4350,6050 -4150,6250 -2950,6250 -2875,6325 -725,6325 -450,6050 -450,5700 -525,5625 -525,4325 -400,4200 -400,3925 -425,3900 -425,3775 -500,3700 -550,3700 -550,3625 -475,3625 -350,3750 -350,4275 -450,4375 -450,5575 -400,5625 -375,5650 -375,6075 -700,6400 -4150,6400 -4400,6150 -4400,3700 -4250,3550 -3624.96,3550 -3498.71,3423.75 -3498.71,3300 -3453.15,3254.44 -3453.15,3250
D5V on S1 (hatched 90Degree grid 10 track 10, remove dead copper): -3280,3250 -3150,3250 -3150,3375 -3525,3750 -3650,3750 -3925,4025 -4250,4025 -4250,5775 -3875,6150 -2900,6150 -2825,6225 -1225,6225 -1100,6100 -1100,5125 -900,5125 -900,6325 -2875,6325 -2950,6250 -4150,6250 -4360,6040 -4360,3755 -4205,3600 -3620,3600 -3295,3275 -3295,3250
VDD_MCU on S1 (hatched 90Degree grid 10 track 15, remove dead copper): -1925,3800 -1775,3800 -1775,5150 -2675,5150 -2675,4375 -2325,4025 -2075.97,4025 -1925.97,3875 -1925.97,3800
GND on BottomLayer (hatched 90Degree grid 25 track 15, remove dead copper): -4500,6800 0,6800 0,0 -4500,0

## Keep-outs
KeepOutLayer:
  lines w4: -4375,1525 -4375,1650 -4250,1650 ; -4375,1775 -4250,1775 -4125,1775 ; -4375,1900 -4250,1900 -4125,1900 ; -4375,2150 -4250,2150 ; -4250,1525 -4250,1650 ; -4250,2025 -4125,2025 ; -4125,1525 -4125,1650 ; -4250,1650 -4125,1650 ; -4250,1650 -4250,2150 ; -4250,2150 -4125,2150 -4125,1650
  lines w5: -4375,1525 -4125,1525 ; -4375,1650 -4375,1970 ; -4375,2055 -4375,2150 ; -4330,2025 -4250,2025 ; -4500,0 -4500,1458.87 ccw(c-5655.29,1704.44) -4500,1950 -4500,6800 0,6800 0,0 -4500,0

## Other copper
TopLayer:
  text "1" at -4275,1700 h50 r90
  text "B" at -4165,1690 h50 r90
S1:
  text "3" at -4275,1985 h50 r90
  text "B" at -4165,1985 h50 r90
BottomLayer:
  text "4" at -4275,2110 h50 r90
  text "B" at -4165,2110 h50 r90
GND (plane layer: these items are gaps in the copper):
  rectangle: -4400,1900 -4100,2300
  region: -4375,1775 -4375,1900 -4400,1900 -4400,1775
  region: -4100,1775 -4100,1900 -4125,1900 -4125,1775
  region: -4100,1505 -4100,1775 -4400,1775 -4400,1505
  lines w4: -4375,1525 -4375,1650 ; -4375,1775 -4255,1775 ; -4375,1900 -4250,1900 -4125,1900 ; -4375,2025 -4250,2025 -4125,2025 ; -4255,1650 -4250,1650 ; -4250,1525 -4250,1650 ; -4250,1775 -4125,1775 ; -4125,1525 -4125,1650 ; -4375,1650 -4250,1650 ; -4375,1650 -4375,2150 -4250,2150 ; -4250,1650 -4250,2150 ; -4250,1650 -4125,1650 ; -4250,2150 -4125,2150 -4125,1650
  text "2" at -4275,1820 h50 r90
  text "B" at -4165,1820 h50 r90

## Silkscreen, mask and mechanical layers (free items; w line width, h text height)
TopOverlay:
  drawing of 5747 lines, arcs and shapes, not listed
  text "Motor control" at -2025,6700 h40
  text "1" at -1050,6675 h36
  text "CAN2" at -4275,6250 h40
  text "X1" at -1625,6240 h36
  text "MCO" at -1450,6240 h36
  text "1" at -1700,6150 h36
  text "1" at -955,6145 h36
  text "2" at -875,6145 h36
  text "1" at -3660,6135 h36
  text "2" at -3565,6135 h36
  text "RMII_CLK" at -2200,6075 h36
  text "MII_CLK" at -1975,6075 h36
  text "I2S_MCK" at -3135,6065 h36
  text "MC_EnA" at -2905,6060 h36
  text "GND" at -3825,6050 h36
  text "PC6" at -3475,6050 h36
  text "GND" at -1125,6050 h36
  text "PD15" at -790,6050 h36
  text "1" at -3115,5975 h36
  text "1" at -2185,5975 h36
  text "PA8" at -3230,5965 h35
  text "PC7" at -3825,5950 h36
  text "PC8" at -3475,5950 h36
  text "PD14" at -1125,5950 h36
  text "PD13" at -790,5950 h36
  text "PC9" at -3825,5850 h36
  text "PA8" at -3475,5850 h36
  text "PD12" at -1125,5850 h36
  text "PD11" at -790,5850 h36
  text "PA9" at -3825,5750 h36
  text "PA10" at -3475,5750 h36
  text "PD10" at -1125,5750 h36
  text "PD9" at -775,5750 h36
  text "PC13" at -1150,5705 h36
  text "25MHz" at -1630,5700 h36
  text "CAN2_TR" at -3958,5699 h36 r90
  text "PA0" at -3825,5650 h36
  text "GND" at -3475,5650 h36
  text "GND" at -775,5650 h36
  text "RST" at -1150,5605 h36
  text "PC14" at -3825,5550 h36
  text "PA11" at -3475,5550 h36
  text "PD8" at -775,5550 h36
  text "USART" at -300,5500 h40
  text "RMII" at -2470,5475 h36 r90
  text "PA12" at -3825,5450 h36
  text "PA13" at -3475,5450 h36
  text "1" at -3260,5450 h36
  text "1" at -2835,5450 h36
  text "PB15" at -1125,5450 h36
  text "PB14" at -775,5450 h36
  text "PC15" at -3825,5350 h36
  text "PA14" at -3475,5350 h36
  text "PB13" at -1125,5350 h36
  text "PB12" at -775,5350 h36
  text "PC10" at -3825,5250 h36
  text "PC11" at -3475,5250 h36
  text "PB11" at -1125,5250 h36
  text "PB10" at -775,5250 h36
  text "GND" at -3825,5150 h36
  text "PA15" at -3475,5150 h36
  text "D5V" at -1125,5150 h36
  text "PE15" at -775,5150 h36
  text "PC12" at -3825,5050 h36
  text "PD0" at -3475,5050 h36
  text "PE14" at -1125,5050 h36
  text "PE13" at -775,5050 h36
  text "BOOT SELECT" at -3350,5035 h40
  text "SW1" at -3350,4955 h40
  text "SW2" at -3225,4955 h40
  text "BOOT" at -3025,4955 h40
  text "PD1" at -3825,4950 h36
  text "PD2" at -3475,4950 h36
  text "CAN1" at -4250,4900 h40
  text "X" at -3300,4885 h40
  text "0" at -3185,4885 h40
  text "User  Flash" at -3090,4885 h40
  text "AIN-" at -1195,4865 h35
  text "AIN+" at -1330,4860 h35
  text "PD3" at -3825,4850 h36
  text "PD4" at -3475,4850 h36
  text "PE12" at -1025,4850 h36 r90
  text "PE11" at -775,4850 h36
  text "0" at -3300,4815 h40
  text "1" at -3180,4815 h40
  text "System memory" at -3090,4815 h40
  text "PD5" at -3825,4750 h36
  text "PD6" at -3475,4750 h36
  text "PE9" at -775,4750 h36
  text "1" at -3295,4745 h40
  text "1" at -3180,4745 h40
  text "SRAM" at -3090,4745 h40
  text "PE10" at -1115,4705 h36
  text "PD7" at -3825,4650 h36
  text "GND" at -3475,4650 h36
  text "0" at -3260,4650 h40
  text "1" at -3060,4650 h40
  text "PE8" at -1095,4650 h36
  text "GND" at -775,4650 h36
  text "PTP_PPS" at -2795,4575 h36
  text "PE7" at -1095,4550 h36
  text "PB2" at -775,4550 h36
  text "PB3" at -3825,4450 h36
  text "PB4" at -3475,4450 h36
  text "PB1" at -1090,4450 h36
  text "PB0" at -775,4450 h36
  text "PB5" at -3825,4350 h36
  text "PB6" at -3475,4350 h36
  text "PC5" at -1125,4350 h36
  text "PC4" at -775,4350 h36
  text "CAN1_TR" at -3958,4348 h36 r90
  text "Pin1" at -2905,4275 h30
  text "Pin1" at -2520,4275 h30
  text "PB7" at -3800,4250 h36
  text "PE0" at -3475,4250 h36
  text "PA7" at -1125,4250 h36
  text "PA6" at -775,4250 h36
  text "VREF" at -1990,4175 h35
  text "USB" at -175,4175 h40
  text "GND" at -3800,4150 h36
  text "PE1" at -3475,4150 h36
  text "GND" at -1125,4150 h36
  text "PA5" at -775,4150 h36
  text "PE2" at -3800,4050 h36
  text "PE3" at -3475,4050 h36
  text "PA4" at -1125,4050 h36
  text "PA3" at -775,4050 h36
  text "PE4" at -3800,3950 h36
  text "PE5" at -3475,3950 h36
  text "PA2" at -1125,3950 h36
  text "PA1" at -775,3950 h36
  text "BL_RST" at -1575,3920 h35
  text "BL_BOOT0" at -1250,3910 h35
  text "MCUVDD" at -2030,3885 h36
  text "IDD" at -1810,3885 h36
  text "PC2" at -785,3875 h36
  text "PB8" at -3800,3850 h36
  text "PB9" at -3475,3850 h36
  text "PC3" at -1105,3850 h36
  text "1" at -2050,3770 h36
  text "PE6" at -3825,3750 h36
  text "3V3" at -3475,3750 h36
  text "PC1" at -1105,3750 h36
  text "PC0" at -785,3750 h36
  text "MII_CRS" at -2055,3715 h36
  text "WKUP" at -1825,3715 h36
  text "D5V" at -3825,3650 h36
  text "GND" at -3475,3650 h36
  text "PC13" at -1125,3650 h36
  text "GND" at -790,3650 h36
  text "1" at -2050,3605 h36
  text "49" at -3675,3575 h36
  text "50" at -3575,3575 h36
  text "49" at -975,3575 h36
  text "50" at -875,3575 h36
  text "PSU" at -4275,3525 h40
  text "DC5V" at -4125,3525 h40
  text "USB: USB 5V power source" at -3275,3375 h36 r90
  text "DTB: Daughter Board power source" at -3175,3375 h36 r90
  text "PSU: Power Supply Unit" at -3075,3375 h36 r90
  text "MII_RXD1" at -2470,3250 h36 r90
  text "MII_RXD0" at -2295,3250 h36 r90
  text "3V3" at -1940,3230 h36 r90
  text "Anti_TMP" at -2110,3225 h36 r90
  text "MII_RXDV" at -2645,3215 h36 r90
  text "SDcard_defect" at -2995,3150 h35 r90
  text "SD_CS" at -2815,3150 h36 r90
  text "I2C1_SCK" at -1770,3150 h36 r90
  text "ROM_WP" at -1595,3150 h36 r90
  text "TRST" at -1255,3100 h36
  text "BT" at -1940,3075 h36 r90
  text "USB" at -3275,3050 h35 r90
  text "DTB" at -3175,3050 h35 r90
  text "PSU" at -3075,3050 h35 r90
  text "IDD" at -2110,3050 h36 r90
  text "SMT_IO" at -2645,3000 h36 r90
  text "1" at -2585,3000 h36
  text "SMT_CLK" at -2470,3000 h36 r90
  text "1" at -2410,3000 h36
  text "SMT_RST" at -2295,3000 h36 r90
  text "1" at -2235,3000 h36
  text "1" at -2060,3000 h36
  text "+" at -4300,2970 h40 r270
  text "-" at -4120,2965 h40 r270
  text "TRACE" at -775,2960 h40 r90
  text "JTAG" at -400,2500 h40 r90
  text "1" at -460,2000 h36
  text "IrDA" at -200,1800 h40
  text "S" at -4275,1570 h50 r90
  text "C" at -4160,1565 h50 r90
  text "GND" at -4330,1330 h36
  text "5V" at -4195,1330 h36
  text "MSD" at -4000,1325 h40
  text "3V3" at -4335,1100 h36
  text "2V5" at -4215,1100 h36
  text "AUX2" at -4375,675 h36
  text "AUX1" at -4215,675 h36
BottomOverlay:
  drawing of 906 lines, arcs and shapes, not listed
  text "A" at -4275,2225 h50 r90
  text "B" at -4165,2225 h50 r90
  text "Smart Card" at -1800,1500 h40
Mechanical1:
  lines w5: -4500,0 0,0 0,6800 -4500,6800 -4500,1950 cw(c-5655.29,1704.44) -4500,1458.87 -4500,0

## Text inside footprints (layer, text, board x,y; h text height)
CN5: BottomOverlay "NC" at -2325,450 h40 r90; BottomOverlay "CLK" at -2225,1100 h40 r90; BottomOverlay "VCC" at -2025,1100 h40 r90; BottomOverlay "NC" at -2325,1100 h40 r90; BottomOverlay "RST" at -2125,1100 h40 r90; BottomOverlay "GND" at -2025,450 h40 r90; BottomOverlay "NC" at -2125,450 h40 r90; BottomOverlay "I/O" at -2225,450 h40 r90
CN12: TopOverlay "1" at -800,3425 h35 r270
U25: TopOverlay "-" at -1905,1950 h60; TopOverlay "+" at -2390,1950 h60